# Altium PCB PAYL0009 GMSK Prototyping Board.PcbDoc
Units mm, origin at the board's own origin, x right, y up, seen from the top; angles counter-clockwise.
Board outline 100 x 50 mm, 2 copper layers (Top Layer, Bottom Layer); 75 components, 84 nets, 312 pads, 94 vias.
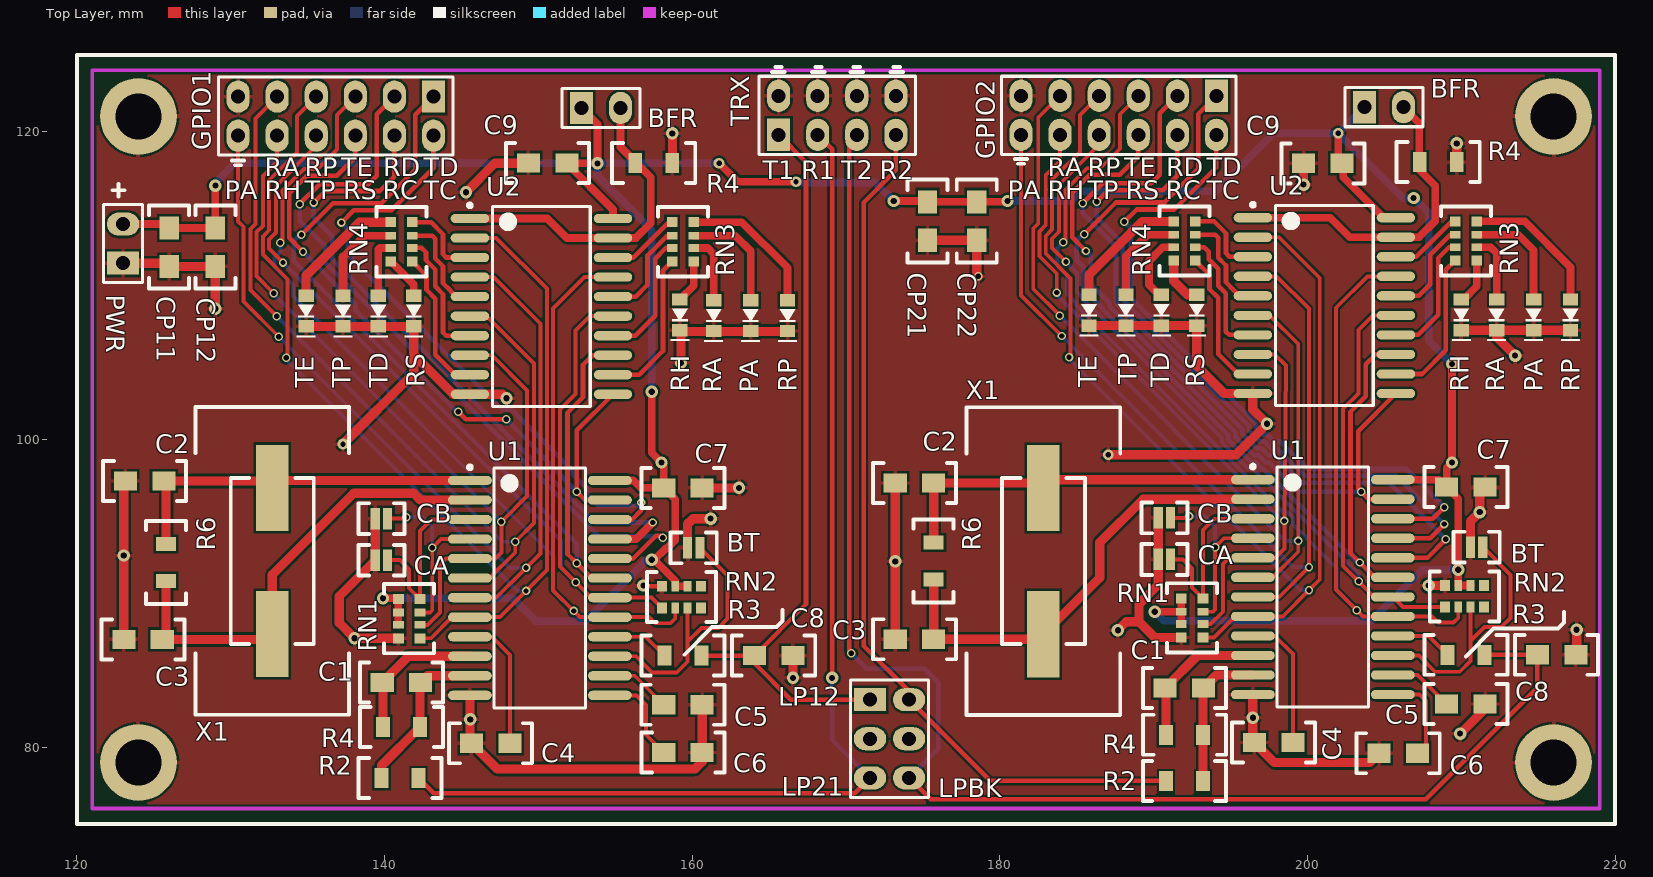
[diagram p0: Top Layer view]
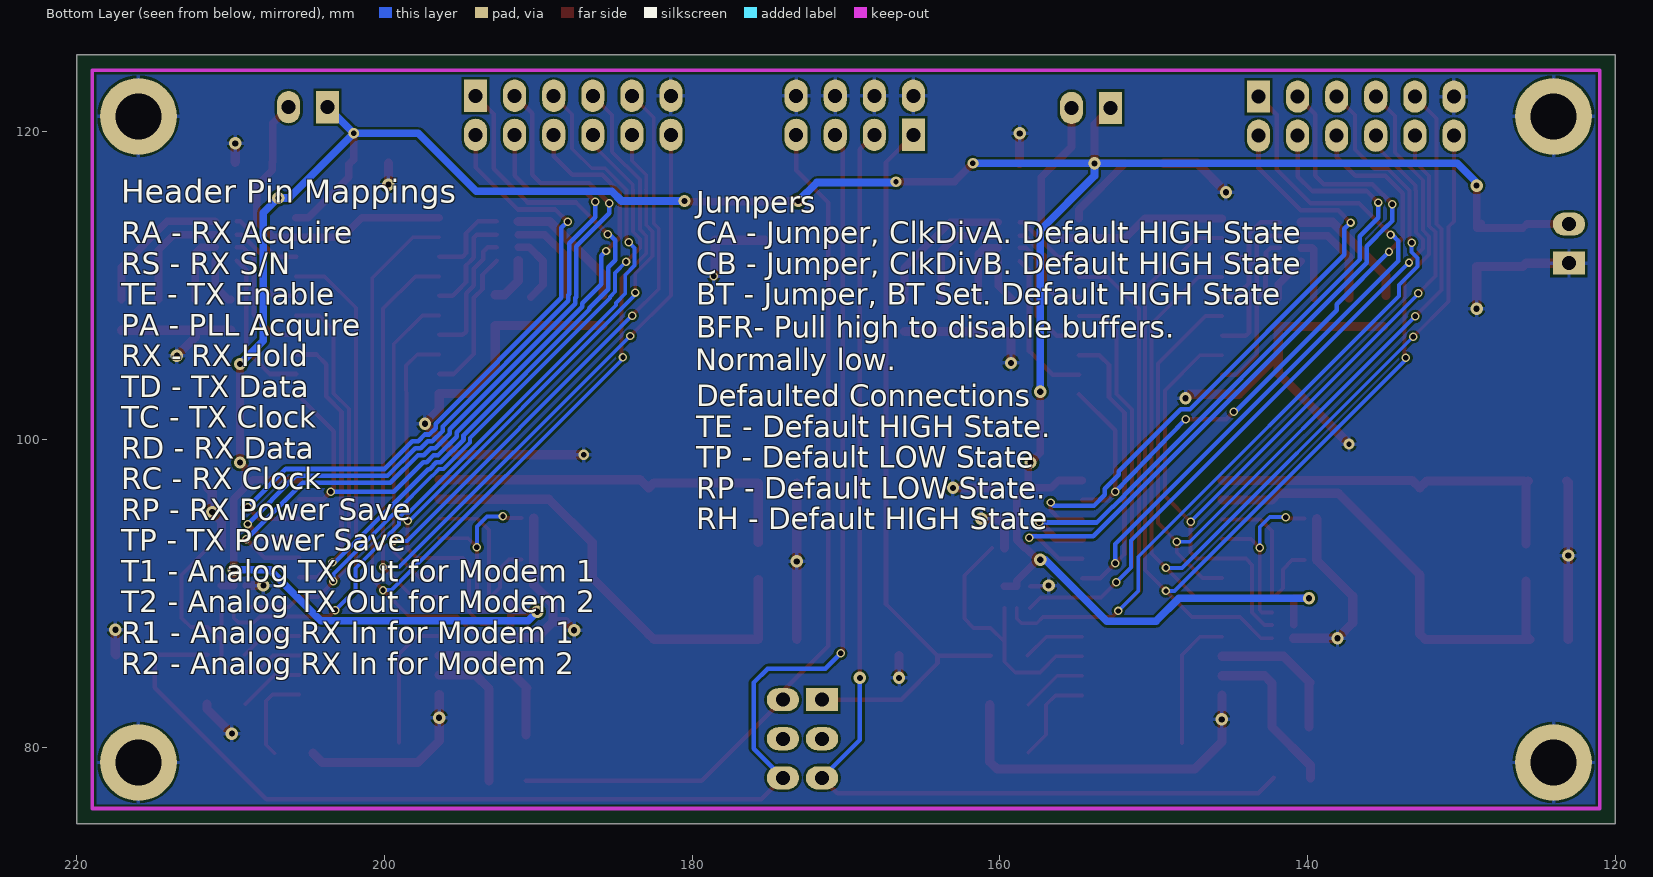
[diagram p1: Bottom Layer view, seen from below]

## Layer stack, top to bottom
Top Layer: signal copper 0.0356
Dielectric: dielectric 0.32, FR-4, Dk 4.8
Bottom Layer: signal copper 0.0356

## Board outline
120,125 220,125 220,75 120,75

## Design rules (kind name [scope] priority, off if disabled: settings)
Clearance [All] p1: gap=0.152
ComponentClearance [OnLayer('Top Layer') vs OnLayer('Top Layer')] p1: gap=0.1 collisioncheckmode=3 verticalgap=0 showdistances=FALSE
HoleSize [All] p1: absolutevalues=TRUE maxlimit=6.35 minlimit=0.3 maxpercent=80.000 minpercent=20.000
MinimumSolderMaskSliver [All] p1: minsoldermaskwidth=0.1
PasteMaskExpansion [All] p1: expansion=0.1
PolygonConnect [All] p1: connectstyle=Relief reliefconductorwidth=0.254 reliefentries=4 polygonreliefangle="90 Angle"
RoomDefinition "GMSK Prototyping Board" [InComponentClass('GMSK Prototyping Board')] p1: confinementstyle=ConfineIn formatcopy=TRUE lockcomponents=FALSE outline 219,76 219,124 121,124 121,76
RoutingVias [All] p1: holewidth=0.35 width=0.55 viastyle="Through Hole" minholewidth=0.35 minwidth=0.55 maxholewidth=0.65 maxwidth=1.3
SilkscreenOverComponentPads [All] p1: minsilkscreentomaskgap=0.254
SolderMaskExpansion [All] p1: expansion=0.1
Width [All] p1: maxlimit=0.6 minlimit=0.2 preferedwidth=0.25
23 further rules are at their usual default settings.

## Classes and differential pairs
channel class "GMSK Modem w Proto": S1 S2
component class S2: BFR C1 C2 C3 C4 C5 C6 C7 C8 CB PA R2 R3 R6 RA RH RN1 RN2 RN3 RN4 RP RS TD TE TP U1 U2 X1
component class "GMSK Prototyping Board": CP11 CP12 CP21 CP22 GPIO1 GPIO2 LPBK PWR TRX
component class S1: C1_S1 C2_S1 C3_S1 C4_S1 C5_S1 C6_S1 C7_S1 C8_S1 CBFR1_S1 D1_U1 D2_U1 D3_U1 D4_U1 D5_U1 D6_U1 D7_U1 D8_U1 J1_S1 J2_S1 J3_S1 J4_S1 R6_S1 R10_S1 R11_S1 RN1_S1 RN2_S1 RN3_S1 RN4_S1 U1_S1 U2_S1 X1_S1

## Components (designator, comment, footprint, x,y, rotation, side; value= is the part's Value field where it differs from the comment)
BFR "Header 2" HDR1X2 203.7,121.6 r0 top (schematic designator J4)
BFR "Header 2" HDR1X2 152.8,121.55 r0 top (schematic designator J4)
BT "Jumper" "Solder Jumper C" 211,93 r0 top (schematic designator J3)
BT "Jumper" "Solder Jumper C" 160.1,92.95 r0 top (schematic designator J3)
C1 "0805 Cap" "0805 Cap" 192,83.85 r180 top
C1 "0805 Cap" "0805 Cap" 141.1,84.2 r180 top
C2 "0805 Cap" "0805 Cap" 174.45,97.17 r0 top
C2 "0805 Cap" "0805 Cap" 124.4,97.3 r0 top
C3 "0805 Cap" "0805 Cap" 174.45,87.01 r0 top
C3 "0805 Cap" "0805 Cap" 124.3,87 r0 top
C4 "0805 Cap" "0805 Cap" 197.8,80.3 r0 top
C4 "0805 Cap" "0805 Cap" 146.9,80.25 r0 top
C5 "0805 Cap" "0805 Cap" 210.3,82.8 r180 top
C5 "0805 Cap" "0805 Cap" 159.4,82.75 r180 top
C6 "0805 Cap" "0805 Cap" 205.9,79.6 r180 top
C6 "0805 Cap" "0805 Cap" 159.4,79.65 r0 top
C7 "0805 Cap" "0805 Cap" 210.3,96.9 r180 top
C7 "0805 Cap" "0805 Cap" 159.4,96.85 r180 top
C8 "0805 Cap" "0805 Cap" 216.2,86 r180 top
C8 "0805 Cap" "0805 Cap" 165.3,85.95 r180 top
C9 "0805 Cap" "0805 Cap" 150.6,117.975 r180 top (schematic designator CBFR)
C9 "0805 Cap" "0805 Cap" 201,117.95 r180 top (schematic designator CBFR)
CA "Jumper" "Solder Jumper C" 190.7,92.2 r180 top (schematic designator J1)
CA "Jumper" "Solder Jumper C" 139.8,92.15 r180 top (schematic designator J1)
CB "Jumper" "Solder Jumper C" 190.7,94.9 r0 top (schematic designator J2)
CB "Jumper" "Solder Jumper C" 139.8,94.85 r0 top (schematic designator J2)
CP11 "0805 Cap" "0805 Cap" 126,112.5 r90 top
CP12 "0805 Cap" "0805 Cap" 129,112.5 r90 top
CP21 "0805 Cap" "0805 Cap" 175.3,114.2 r270 top
CP22 "0805 Cap" "0805 Cap" 178.5,114.2 r270 top
GPIO1 "Header 6X2" HDR2X6 143.18,122.29 r180 top (schematic designator P1)
GPIO2 "Header 6X2" HDR2X6 194.08,122.34 r180 top (schematic designator P2)
LPBK "Header 3X2" HDR2X3 171.56,83.08 r270 top (schematic designator J6)
PA "Green LED" "0805 LED" 214.7,108.1 r270 top (schematic designator PLA1)
PA "Green LED" "0805 LED" 163.8,108.05 r270 top (schematic designator PLA1)
PWR "Header 2" HDR1X2 123,111.46 r90 top
R2 "0805 Resistor" "0805 Resistor" 192,77.8 r180 top (schematic designator R4)
R2 "0805 Resistor" "0805 Resistor" 141,78 r0 top (schematic designator R4)
R3 "0805 Resistor" "0805 Resistor" 210.3,86 r180 top (schematic designator R10)
R3 "0805 Resistor" "0805 Resistor" 159.4,85.95 r180 top (schematic designator R10)
R4 "Comment" "0805 Resistor" 141.1,81.3 r0 top
R4 "Comment" "0805 Resistor" 192,80.8 r0 top
R4 "0805 Resistor" "0805 Resistor" 157.5,117.975 r0 top
R4 "0805 Resistor" "0805 Resistor" 208.5,118.025 r0 top
R6 "0805 Resistor" "0805 Resistor" 175.7,92.1 r90 top
R6 "0805 Resistor" "0805 Resistor" 125.8,92 r90 top
RA "Green LED" "0805 LED" 212.3,108.1 r270 top (schematic designator RXA1)
RA "Green LED" "0805 LED" 161.4,108.05 r270 top (schematic designator RXA1)
RH "Red LED" "0805 LED" 210,108.1 r270 top (schematic designator RXH1)
RH "Red LED" "0805 LED" 159.2,108.1 r270 top (schematic designator RXH1)
RN1 "RN4" ACAS_0612_AC 192.5,88.4 r270 top
RN1 "RN4" ACAS_0612_AC 141.6,88.35 r270 top
RN2 "RN4" ACAS_0612_AC 210.2,89.8 r0 top
RN2 "RN4" ACAS_0612_AC 159.3,89.75 r0 top
RN3 "RN4" ACAS_0612_AC 210.3,112.9 r90 top
RN3 "RN4" ACAS_0612_AC 159.4,112.85 r90 top
RN4 "RN4" ACAS_0612_AC 192,112.9 r270 top
RN4 "RN4" ACAS_0612_AC 141.1,112.85 r270 top
RP "Red LED" "0805 LED" 217.1,108.1 r270 top (schematic designator RPS1)
RP "Red LED" "0805 LED" 166.2,108.05 r270 top (schematic designator RPS1)
RS "Green LED" "0805 LED" 192.8,108.4 r270 top (schematic designator RSN1)
RS "Green LED" "0805 LED" 141.9,108.35 r270 top (schematic designator RSN1)
TD "Green LED" "0805 LED" 190.5,108.4 r270 top (schematic designator TXD1)
TD "Green LED" "0805 LED" 139.6,108.35 r270 top (schematic designator TXD1)
TE "Green LED" "0805 LED" 185.8,108.4 r270 top (schematic designator TXE1)
TE "Green LED" "0805 LED" 134.9,108.35 r270 top (schematic designator TXE1)
TP "Green LED" "0805 LED" 188.2,108.4 r270 top (schematic designator TPS1)
TP "Green LED" "0805 LED" 137.3,108.35 r270 top (schematic designator TPS1)
TRX "Header 4X2" HDR2X4 165.62,119.8 r0 top
U1 "CMX589A GMSK Modem" "SOIC24 - GMSK MODEM" 201,90.4 r0 top
U1 "CMX589A GMSK Modem" "SOIC24 - GMSK MODEM" 150.1,90.35 r0 top
U2 "74HC244 Octal Tri-State Buffer" SOIC20 201.1,108.7 r0 top
U2 "74HC244 Octal Tri-State Buffer" SOIC20 150.2,108.65 r0 top
X1 "HC49 Crystal" HC49 182.832,92.09 r270 top
X1 "HC49 Crystal" HC49 132.7,92.1 r270 top

## Footprints (in the part's own frame and the unit in brackets; to place one, negate y for a bottom-side part, rotate by r counter-clockwise, add the part's x,y. Pads: shape width x height; smd on the part's side, far side on the other; paste and mask are expansions set on the pad)
"0805 Cap" [mm]
  rect 1.5x1.25 smd: 1(1.25,0) 2(-1.25,0)
  silkscreen extent -2.7,-1.3 2.7,1.3, body extent -1.55,-0.63 1.55,0.63, height 1
"0805 LED" [mm] "0805 Light Emitting Diode"
  rect 0.8x1 smd: 1(-1,0) 2(1,0)
  silkscreen extent -0.4,-0.6 1.7,0.6
"0805 Resistor" [mm]
  rect 0.9x1.3 smd: 1(1.2,0) 2(-1.2,0)
  silkscreen extent -2.7,-1.3 2.7,1.3, body extent -1.4,-0.63 1.4,0.63, height 0.5
ACAS_0612_AC [mm]
  rect 0.65x0.7 smd: 1(-1.275,-0.7) 4(1.275,-0.7) 5(1.275,0.7) 8(-1.275,0.7)
  rect 0.5x0.7 smd: 2(-0.4,-0.7) 3(0.4,-0.7) 6(0.4,0.7) 7(-0.4,0.7)
  silkscreen extent -2.25,-1.63 2.25,1.63, body extent -1.6,-0.75 1.6,0.75, height 0.45
HC49 [mm] "Crystal Oscilator"
  rect 5.6x2.1 smd: 1(-4.75,0) 2(4.75,0)
  silkscreen extent -10,-5 10,5, body extent -5.4,-2.7 5.4,2.7, height 4.2
HDR1X2 [mm]
  rect 1.5x2.1 hole 0.91: 1(0,0)
  oval 1.5x2.1 hole 0.91: 2(2.54,0)
  silkscreen extent -1.27,-1.27 3.81,1.27, body extent -1.17,-1.17 3.71,1.17, height 7.01
HDR2X3 [mm]
  rect 1.5x2.1 hole 0.91: 1(0,0)
  oval 1.5x2.1 hole 0.91: 2(0,2.54) 3(2.54,0) 4(2.54,2.54) 5(5.08,0) 6(5.08,2.54)
  silkscreen extent -1.27,-1.27 6.35,3.81, body extent -1.17,-1.17 6.25,3.71, height 7.01
HDR2X4 [mm]
  rect 1.5x2.1 hole 0.91: 1(0,0)
  oval 1.5x2.1 hole 0.91: 2(0,2.54) 3(2.54,0) 4(2.54,2.54) 5(5.08,0) 6(5.08,2.54) 7(7.62,0) 8(7.62,2.54)
  silkscreen extent -1.27,-1.27 8.89,3.81, body extent -1.17,-1.17 8.79,3.71, height 7.01
HDR2X6 [mm]
  rect 1.5x2.1 hole 0.91: 1(0,0)
  oval 1.5x2.1 hole 0.91: 2(0,2.54) 3(2.54,0) 4(2.54,2.54) 5(5.08,0) 6(5.08,2.54) 7(7.62,0) 8(7.62,2.54) 9(10.16,0) 10(10.16,2.54) 11(12.7,0) 12(12.7,2.54)
  silkscreen extent -1.27,-1.27 13.97,3.81, body extent -1.18,-1.18 13.87,3.72, height 7.01
SOIC20 [mm]
  oval 2.5x0.6 smd: 1(-4.65,5.715) 2(-4.65,4.445) 3(-4.65,3.175) 4(-4.65,1.905) 5(-4.65,0.635) 6(-4.65,-0.635) 7(-4.65,-1.905) 8(-4.65,-3.175) 9(-4.65,-4.445) 10(-4.65,-5.715) 11(4.65,-5.715) 12(4.65,-4.445) 13(4.65,-3.175) 14(4.65,-1.905) 15(4.65,-0.635) 16(4.65,0.635) 17(4.65,1.905) 18(4.65,3.175) 19(4.65,4.445) 20(4.65,5.715)
  silkscreen extent -4.77,-6.5 3.17,6.69, body extent -5.36,-6.5 5.33,6.5, height 2.65
"SOIC24 - GMSK MODEM" [mm]
  oval 2.85x0.6 smd: 1(-4.55,6.985) 2(-4.55,5.715) 3(-4.55,4.445) 4(-4.55,3.175) 5(-4.55,1.905) 6(-4.55,0.635) 7(-4.55,-0.635) 8(-4.55,-1.905) 9(-4.55,-3.175) 10(-4.55,-4.445) 11(-4.55,-5.715) 12(-4.55,-6.985) 13(4.55,-6.985) 14(4.55,-5.715) 15(4.55,-4.445) 16(4.55,-3.175) 17(4.55,-1.905) 18(4.55,-0.635) 19(4.55,0.635) 20(4.55,1.905) 21(4.55,3.175) 22(4.55,4.445) 23(4.55,5.715) 24(4.55,6.985)
  silkscreen extent -4.67,-7.8 2.97,7.96, body extent -5.38,-7.79 5.38,7.79, height 2.67
"Solder Jumper C" [mm] "Solder Jumper C"
  rect 0.6x1.4 smd: 1(0.4,0) 2(-0.4,0)
  silkscreen extent -1.5,-1 1.5,1

## Part data
BFR BFR PWR: "Header, 2-Pin"
BT BT CA CA CB CB: library part "Solder Bridge", "Solder Bridge"
C1 C1 C2 C2 C3 C3 C8 C8: library part "0805 MLCC - NP0, 5%", "0805 MLCC - NP0, 5%"
C4 C4 C5 C5 C6 C6 C7 C7 C9 C9 CP11 CP12 CP21 CP22: library part "0805 MLCC - X7R, 10%", "0805 MLCC - X7R, 10%"
GPIO1 GPIO2: "Header, 6-Pin, Dual row"
LPBK: "Header, 3-Pin, Dual row"
PA PA RA RA RS RS TD TD TE TE TP TP: library part "LED, SMD, GREEN", "Chip LED, Green, 0603 Footprint"
R2 R2 R3 R3 R4 R4 R6 R6: library part "0805 Thin Film Resistor 0.1%", "0805 Thin Film Resistor 0.1%"
R4 R4: library part "0805 Thin Film Resistor 0.1%"
RH RH RP RP: library part "LED, SMD, RED", "Chip LED, Red, 0603 Footprint"
TRX: "Header, 4-Pin, Dual row"
U1 U1: library part CMX589A
U2 U2: library part 74HC244, "Octal Non-Inverting Three state buffer"

## Free pads (board coordinates)
  round 5 hole 3: SCR1(124,121) SCR2(216,121) SCR3(124,79) SCR4(216,79)

## Via types
v1: diameter 0.55, hole 0.35, Top Layer to Bottom Layer, tented both sides, 52 vias
v2: diameter 0.8, hole 0.4, Top Layer to Bottom Layer, tented both sides, 36 vias
v3: diameter 0.7, hole 0.35, Top Layer to Bottom Layer, 5 vias
v4: diameter 0.8, hole 0.4, Top Layer to Bottom Layer, 1 vias

## Nets (pads, with @x,y where several pads share a name; then routed paths per layer and width w, separated by ;. In a path a pad name is that pad's centre, name@x,y a point inside that pad or via, vN(x,y) a via of type N, cw(c..) or ccw(c..) an arc to the next point about the centre after c; other vN are vias at no path point)
BT_S1: BT.1@160.5,92.95 RN2.3@159.7,89.05 U1.15@154.65,85.905 | length 17.8
  Top Layer w0.254: U1.15@154.65,85.905 156.345,85.905 157.4,84.85 159,84.85 159.7,85.55 159.7,86.85 ; RN2.3@159.7,89.05 159.7,86.85 ; BT.1@160.5,92.95 162.3,91.15 162.3,88.35 161.7,87.75 160.6,87.75 159.7,86.85
BT_S2: BT.1@211.4,93 RN2.3@210.6,89.1 U1.15@205.55,85.955 | length 17.8
  Top Layer w0.254: U1.15@205.55,85.955 207.245,85.955 208.3,84.9 209.9,84.9 210.6,85.6 210.6,86.9 ; RN2.3@210.6,89.1 210.6,86.9 ; BT.1@211.4,93 213.2,91.2 213.2,88.4 212.6,87.8 211.5,87.8 210.6,86.9
CDIVA_S1: CA.2@140.2,92.15 RN1.8@142.3,89.625 U1.3@145.55,94.795 | length 11.8
  Top Layer w0.254: CA.2@140.2,92.15 141,92.15 141.6,91.55 141.6,90.325 142.3,89.625 142.3,94.05 143.045,94.795 U1.3@145.55,94.795
CDIVA_S2: CA.2@191.1,92.2 RN1.8@193.2,89.675 U1.3@196.45,94.845 | length 11.8
  Top Layer w0.254: CA.2@191.1,92.2 191.9,92.2 192.5,91.6 192.5,90.375 193.2,89.675 193.2,94.1 193.945,94.845 U1.3@196.45,94.845
CDIVB_S1: CB.1@140.2,94.85 RN1.7@142.3,88.75 U1.4@145.55,93.525 | length 12.2
  Top Layer w0.254: CB.1@140.2,94.85 141.3,94.85 v1(141.4,94.95) ; RN1.7@142.3,88.75 142.953,88.75 143.1,88.897 v1(143.1,92.95) 143.675,93.525 U1.4@145.55,93.525
  Bottom Layer w0.254: v1(141.4,94.95) 142.45,94.95 143.1,94.3 v1(143.1,92.95)
CDIVB_S2: CB.1@191.1,94.9 RN1.7@193.2,88.8 U1.4@196.45,93.575 | length 12.2
  Top Layer w0.254: CB.1@191.1,94.9 192.2,94.9 v1(192.3,95) ; RN1.7@193.2,88.8 193.853,88.8 194,88.947 v1(194,93) 194.575,93.575 U1.4@196.45,93.575
  Bottom Layer w0.254: v1(192.3,95) 193.35,95 194,94.35 v1(194,93)
GND: BT.2 C2.2 C3.2 C4.2 C5.2 C6.1 C7.2 C8.2 C9.1 CA.1 CB.2 CP11.2 CP12.2 CP21.1 CP22.1 GPIO1.11 GPIO2.11 PA.2 pad.SCR1 pad.SCR2 pad.SCR3 pad.SCR4 PWR.1 R4.1@158.7,117.975 R4.1@209.7,118.025 RA.2 RH.2 RN1.4 RN2.8 RP.2 RS.2 TD.2 TE.2 TP.2 TRX.2 TRX.4 TRX.6 TRX.8 U1.12 U2.10 | length 190.8
  Top Layer w0.3: v2(156.825,90.5) 156.875,90.45 RN2.8@158.025,90.45
  Top Layer w0.6: PWR.1@122.7,111.1 PWR.1@122.95,111.35 ; PWR.1 125.79,111.46 CP11.2 CP12.2 v2(129,108.5) ; C3.2@123.05,87 v2(123.05,92.45) 123.05,97.2 C2.2@123.15,97.3 ; TE.2@135.05,107.35 141.9,107.35 141.9,105.5 ; v3(137.3,99.7) 141.9,104.3 141.9,105.5 ; CB.2@139.4,94.85 139.4,92.15 137.05,89.8 137.05,88.075 v2(138.05,87.075) RN1.4@140.9,87.075 ; v2(145.3,116.075) 147.175,117.95 C9.1@149.35,117.95 ; U1.12@145.55,83.365 145.55,80.35 145.65,80.25 147.327,78.573 160.175,78.573 160.65,79.047 160.65,79.65 C5.2@160.65,82.75 ; v2(147.925,102.675) 147.665,102.935 145.55,102.935 144.465,102.935 141.9,105.5 ; R4.1@158.713,117.962 v2@158.713,119.9 ; v2(159.275,104.975) 159.275,107.025 RP.2@166.175,107.025 ; BT.2@159.7,92.95 159.7,94.5 160.05,94.85 v2(161.2,94.85) ; C7.2@160.65,96.85 v2(163.05,96.85) ; v2(166.55,84.5) C8.2@166.55,85.95 ; C3.2@173.2,87.01 C2.2@173.2,97.17 ; CP21.1 CP22.1 178.5,110.7 v1(178.6,110.6) ; TE.2@185.8,107.4 188.2,107.4 190.5,107.4 192.8,107.4 192.8,104.785 194.6,102.985 196.45,102.985 196.45,101.95 v2(197.375,101.025) 195.35,99 v3(187.05,99) ; v2(187.675,87.6) 188.225,88.15 189.05,88.15 ; CB.2@190.3,94.9 190.3,92.2 190.3,90.55 189.05,89.3 189.05,88.15 ; RN1.4@191.8,87.125 190.075,87.125 189.05,88.15 ; U1.12@196.45,83.415 v2(196.45,81.907) 196.45,80.4 196.55,80.3 197.85,79 204.05,79 C6.1@204.65,79.6 ; v2(199.75,116.564) C9.1@199.75,117.95 ; v2(207.875,90.5) RN2.8@208.925,90.5 ; R4.1@209.7,118.025 v2(209.7,119.25) ; v2(209.925,80.875) 211.55,82.5 C5.2@211.55,82.8 ; RH.2@210,107.1 RA.2@212.3,107.1 ; BT.2@210.6,93 210.6,94.675 v2(211.2,95.275) 211.2,96.55 C7.2@211.55,96.9 ; RA.2@212.3,107.25 RA.2@212.3,107.1 ; v2(213.5,105.45) 212.3,106.65 RA.2@212.3,107.1 ; RP.2@217.1,107.1 214.7,107.1 RA.2@212.3,107.1 ; C8.2@217.45,86 217.5,86.05 v2(217.5,87.625)
  other v2: 145.575,81.8 173.2,92.075 158.7,119.9
NetC1_S1_1: C1.1@139.85,84.2 R4.2@139.9,81.3 U1.10@145.55,85.905 | length 9.3
  Top Layer w0.6: R4.2@139.9,81.3 139.9,84.15 139.85,84.2 141.555,85.905 U1.10@145.55,85.905
NetC1_S1_2: C1.2@142.35,84.2 R2.2@139.8,78 R4.1@142.3,81.3 U1.11@145.55,84.635 | length 10.6
  Top Layer w0.6: R2.2@139.8,78 139.8,78.8 142.3,81.3 142.3,84.15 142.35,84.2 142.785,84.635 U1.11@145.55,84.635
NetC1_S2_1: C1.1@190.75,83.85 R4.2@190.8,80.8 U1.10@196.45,85.955 | length 9.6
  Top Layer w0.6: R4.2@190.8,80.8 190.8,83.8 190.75,83.85 192.855,85.955 U1.10@196.45,85.955
NetC1_S2_2: C1.2@193.25,83.85 R2.2@193.2,77.8 R4.1@193.2,80.8 U1.11@196.45,84.685 | length 9.6
  Top Layer w0.6: R2.2@193.2,77.8 193.2,80.8 193.2,83.8 193.25,83.85 194.085,84.685 U1.11@196.45,84.685
NetC2_S1_1: C2.1@125.65,97.3 R6.1@125.8,93.2 U1.1@145.55,97.335 X1.1@132.7,96.85 | length 24.4
  Top Layer w0.6: C2.1@125.65,97.3 C2.1@125.8,97.15 ; R6.1@125.8,93.2 C2.1@125.8,97.15 ; U1.1@145.55,97.335 133.185,97.335 132.7,96.85 132.25,97.3 125.95,97.3 C2.1@125.8,97.15
NetC2_S2_1: C2.1@175.7,97.17 R6.1@175.7,93.3 U1.1@196.45,97.385 X1.1@182.832,96.84 | length 25
  Top Layer w0.6: R6.1@175.7,93.3 175.7,97.17 182.502,97.17 182.832,96.84 183.377,97.385 U1.1@196.45,97.385
NetC3_S1_1: C3.1@125.55,87 R6.2@125.8,90.8 U1.2@145.55,96.065 X1.2@132.7,87.35 | length 30.3
  Top Layer w0.6: R6.2@125.8,90.8 125.8,87.25 125.55,87 132.35,87 132.7,87.35 132.7,91.2 138,96.5 141.9,96.5 142.335,96.065 U1.2@145.55,96.065
NetC3_S2_1: C3.1@175.7,87.01 R6.2@175.7,90.9 U1.2@196.45,96.115 X1.2@182.832,87.34 | length 29.8
  Top Layer w0.6: R6.2@175.7,90.9 175.7,87.01 182.502,87.01 182.832,87.34 186.5,91.008 186.5,93.3 189.315,96.115 U1.2@196.45,96.115
NetC4_S1_1: C4.1@148.15,80.25 U1.9@145.55,87.175 | length 8.8
  Top Layer w0.254: U1.9@145.55,87.175 146.975,87.175 148.15,86 C4.1@148.15,80.25
NetC4_S2_1: C4.1@199.05,80.3 U1.9@196.45,87.225 | length 8.8
  Top Layer w0.254: U1.9@196.45,87.225 197.875,87.225 199.05,86.05 C4.1@199.05,80.3
NetC5_S1_1: C5.1@158.15,82.75 U1.14@154.65,84.635 | length 4.3
  Top Layer w0.254: U1.14@154.65,84.635 156.265,84.635 C5.1@158.15,82.75
NetC5_S2_1: C5.1@209.05,82.8 U1.14@205.55,84.685 | length 4.3
  Top Layer w0.254: U1.14@205.55,84.685 207.165,84.685 C5.1@209.05,82.8
NetC6_S1_2: C6.2@158.15,79.65 U1.13@154.65,83.365 | length 6.2
  Top Layer w0.254: U1.13@154.65,83.365 156.385,83.365 157,82.75 157,80.8 C6.2@158.15,79.65
NetC6_S2_2: C6.2@207.15,79.6 U1.13@205.55,83.415 | length 5.9
  Top Layer w0.254: U1.13@205.55,83.415 207.285,83.415 207.7,83 207.7,80.15 C6.2@207.15,79.6
NetD1_U1_1: RH.1@159.2,109.1 RN3.1@160.1,111.575 | length 2.8
  Top Layer w0.5: RH.1@159.2,109.1 160.1,110 RN3.1@160.1,111.575
NetD1_U2_1: RH.1@210,109.1 RN3.1@211,111.625 | length 3
  Top Layer w0.5: RH.1@210,109.1 210.15,109.1 211,109.95 RN3.1@211,111.625
NetD2_U1_1: RA.1@161.4,109.05 RN3.2@160.1,112.45 | length 4.5
  Top Layer w0.5: RN3.2@160.1,112.45 161,112.45 161.4,112.05 RA.1@161.4,109.05
NetD2_U2_1: RA.1@212.3,109.1 RN3.2@211,112.5 | length 4.5
  Top Layer w0.5: RN3.2@211,112.5 211.9,112.5 212.3,112.1 RA.1@212.3,109.1
NetD3_U1_1: PA.1@163.8,109.05 RN3.3@160.1,113.25 | length 7.3
  Top Layer w0.5: RN3.3@160.1,113.25 162.8,113.25 163.8,112.25 PA.1@163.8,109.05
NetD3_U2_1: PA.1@214.7,109.1 RN3.3@211,113.3 | length 7.3
  Top Layer w0.5: RN3.3@211,113.3 213.7,113.3 214.7,112.3 PA.1@214.7,109.1
NetD4_U1_1: RN3.4@160.1,114.125 RP.1@166.2,109.05 | length 9.4
  Top Layer w0.5: RN3.4@160.1,114.125 163.225,114.125 166.2,111.15 RP.1@166.2,109.05
NetD4_U2_1: RN3.4@211,114.175 RP.1@217.1,109.1 | length 9.4
  Top Layer w0.5: RN3.4@211,114.175 214.125,114.175 217.1,111.2 RP.1@217.1,109.1
NetD5_U1_1: RN4.4@140.4,111.575 RS.1@141.9,109.35 | length 3
  Top Layer w0.5: RN4.4@140.4,111.575 141.9,110.075 RS.1@141.9,109.2
NetD5_U2_1: RN4.4@191.3,111.625 RS.1@192.8,109.4 | length 3.2
  Top Layer w0.6: RN4.4@191.3,111.625 191.3,110.3 192.2,109.4 RS.1@192.8,109.4
NetD6_U1_1: RN4.3@140.4,112.45 TD.1@139.6,109.35 | length 4
  Top Layer w0.5: TD.1@139.6,109.2 139.6,112.35 139.7,112.45 RN4.3@140.4,112.45
NetD6_U2_1: RN4.3@191.3,112.5 TD.1@190.5,109.4 | length 4.7
  Top Layer w0.5: TD.1@190.5,109.25 189.7,110.05 189.7,111.6 190.6,112.5 RN4.3@191.3,112.5
NetD7_U1_1: RN4.2@140.4,113.25 TP.1@137.3,109.35 | length 6.3
  Top Layer w0.5: 137.3,111.85 138.7,113.25 RN4.2@140.4,113.25
  Top Layer w0.6: TP.1@137.3,109.2 137.3,111.85
NetD7_U2_1: RN4.2@191.3,113.3 TP.1@188.2,109.4 | length 6.2
  Top Layer w0.5: TP.1@188.2,109.4 188.2,111.9 189.6,113.3 RN4.2@191.3,113.3
NetD8_U1_1: RN4.1@140.4,114.125 TE.1@134.9,109.35 | length 8.2
  Top Layer w0.6: TE.1@134.9,109.35 134.9,110.65 138.375,114.125 RN4.1@140.4,114.125
NetD8_U2_1: RN4.1@191.3,114.175 TE.1@185.8,109.4 | length 8.2
  Top Layer w0.6: TE.1@185.8,109.4 185.8,110.7 189.275,114.175 RN4.1@191.3,114.175
NetJ4_S1_2: BFR.2@155.34,121.55 R4.2@156.3,117.975 U2.1@145.55,114.365 U2.19@154.85,113.095 | length 21
  Top Layer w0.5: U2.1@145.55,114.365 150.585,114.365 151.855,113.095 154.85,113.095 156.345,113.095 157.3,114.05 157.3,117.05 155.34,119.01 BFR.2@155.34,121.55
NetJ4_S2_2: BFR.2@206.24,121.6 R4.2@207.3,118.025 U2.1@196.45,114.415 U2.19@205.75,113.145 | length 21.1
  Top Layer w0.5: U2.1@196.45,114.415 201.485,114.415 202.755,113.145 205.75,113.145 207.245,113.145 208.3,114.2 208.3,116.5 207.3,117.5 207.3,118.025 207.275,118.05 207.275,120.565 BFR.2@206.24,121.6
NetR3_S1_1: R3.1@158.2,85.95 U1.16@154.65,87.175 | length 4.1
  Top Layer w0.254: U1.16@154.65,87.175 156.975,87.175 R3.1@158.2,85.95
NetR3_S2_1: R3.1@209.1,86 U1.16@205.55,87.225 | length 4.1
  Top Layer w0.254: U1.16@205.55,87.225 207.875,87.225 R3.1@209.1,86
PLA_S1: RN3.6@158.7,113.25 U2.16@154.85,109.285 | length 6.6
  Top Layer w0.3: U2.16@154.85,109.285 156.335,109.285 157.094,110.044 157.094,111.955 158.388,113.25 RN3.6@158.7,113.25
PLA_S2: RN3.6@209.6,113.3 U2.16@205.75,109.335 | length 6.6
  Top Layer w0.3: U2.16@205.75,109.335 207.235,109.335 207.994,110.094 207.994,112.005 209.288,113.3 RN3.6@209.6,113.3
PLLACQ1: GPIO1.12 U1.7@145.55,89.715 U2.4@145.55,110.555 | length 63
  Top Layer w0.254: GPIO1.12 130.48,114.17 130.825,113.825 130.825,108.975 v1(133.125,106.675) ; U1.7@145.55,89.715 147.265,89.715 v1(149.2,91.65) 150.131,92.581 150.131,107.519 147.095,110.555 U2.4@145.55,110.555
  Bottom Layer w0.254: v1(133.125,106.675) 148.15,91.65 v1(149.2,91.65)
PLLACQ2: GPIO2.12 U1.7@196.45,89.765 U2.4@196.45,110.605 | length 62.2
  Top Layer w0.254: GPIO2.12 181.38,109.37 v1(184.025,106.725) ; U1.7@196.45,89.765 198.165,89.765 v1(200.1,91.7) 200.1,108.5 197.995,110.605 U2.4@196.45,110.605
  Bottom Layer w0.254: v1(184.025,106.725) 199.05,91.7 v1(200.1,91.7)
RPS_S1: RN3.5@158.7,114.125 U2.18@154.85,111.825 | length 4.8
  Top Layer w0.3: U2.18@154.85,111.825 156.175,111.825 158.475,114.125 RN3.5@158.7,114.125
RPS_S2: RN3.5@209.6,114.175 U2.18@205.75,111.875 | length 4.8
  Top Layer w0.3: U2.18@205.75,111.875 207.075,111.875 209.375,114.175 RN3.5@209.6,114.175
RSN_S1: RN4.5@141.8,111.575 U2.9@145.55,104.205 | length 9.5
  Top Layer w0.3: RN4.5@141.8,111.575 142.728,110.647 142.728,109.722 143.297,109.153 143.297,105.503 144.595,104.205 U2.9@145.55,104.205
RSN_S2: RN4.5@192.7,111.625 U2.9@196.45,104.255 | length 9.5
  Top Layer w0.3: RN4.5@192.7,111.625 193.628,110.697 193.628,109.772 194.197,109.203 194.197,105.553 195.495,104.255 U2.9@196.45,104.255
RX1: LPBK.5 R2.1@142.2,78 TRX.3 | length 73.4
  Top Layer w0.3: R2.1@142.2,78 143.2,77 170.56,77 LPBK.5 ; TRX.3 169.1,118.86 v4(169.1,84.5)
  Bottom Layer w0.3: v4(169.1,84.5) 169.1,80.46 LPBK.5
RX2: LPBK.2 R2.1@190.8,77.8 TRX.7 | length 57.7
  Top Layer w0.3: TRX.7 173.24,117.49 171.152,115.402 171.152,86.573 174.1,83.625 LPBK.2 179.38,77.8 R2.1@190.8,77.8
RX_PSAVE1: GPIO1.7 RN1.5@142.3,87.075 U1.8@145.55,88.445 U2.2@145.55,113.095 | length 76
  Top Layer w0.254: v1(133.6,105.3) 133.7,105.4 133.7,110.416 132.088,112.028 132.088,113.188 132.5,113.6 132.5,116.85 134.3,118.65 134.3,121.03 GPIO1.7 ; RN1.5@142.3,87.075 143.025,87.075 144.395,88.445 145.55,88.445 147.495,88.445 v1(149.2,90.15) 150.55,91.5 150.55,109.8 147.255,113.095 U2.2@145.55,113.095
  Bottom Layer w0.254: v1(133.6,105.3) 133.7,105.4 133.7,105.1 148.65,90.15 v1(149.2,90.15)
RX_PSAVE2: GPIO2.7 RN1.5@193.2,87.125 U1.8@196.45,88.495 U2.2@196.45,113.145 | length 75.5
  Top Layer w0.254: v1(184.5,105.35) 184.6,105.45 184.6,110.466 182.988,112.078 182.988,113.238 183.4,113.65 183.4,116.9 185.2,118.7 185.2,121.08 GPIO2.7 ; RN1.5@193.2,87.125 193.925,87.125 195.295,88.495 196.45,88.495 198.395,88.495 v1(200.1,90.2) 200.8,90.9 200.8,110.5 198.155,113.145 U2.2@196.45,113.145
  Bottom Layer w0.254: v1(184.5,105.35) 184.6,105.45 184.6,105.15 199.55,90.2 v1(200.1,90.2)
RX_S/N1: GPIO1.6 U1.23@154.65,96.065 U2.11@154.85,102.935 | length 45.1
  Top Layer w0.3: v1(134.7,112.2) 133.8,113.1 133.8,116 134.95,117.15 136.9,117.15 138.1,118.35 GPIO1.6 ; v1(144.8,101.8) 145.275,101.325 v1(147.925,101.325) ; U1.23@154.65,96.065 153.035,96.065 v1(152.5,96.6) 152.5,100.585 U2.11@154.85,102.935
  Bottom Layer w0.3: v1(134.7,112.2) 138.1,108.8 138.1,108.4 144.7,101.8 v1(144.8,101.8) ; v1(147.925,101.325) v1(152.5,96.6)
RX_S/N2: GPIO2.6 U1.23@205.55,96.115 U2.11@205.75,102.985 | length 46.3
  Top Layer w0.3: v1(185.6,112.25) 184.7,113.15 184.7,116.05 185.85,117.2 187.8,117.2 189,118.4 GPIO2.6 ; U1.23@205.55,96.115 203.985,96.115 v1(203.5,96.6) 203.3,96.8 203.3,100.535 U2.11@205.75,102.985
  Bottom Layer w0.3: v1(185.6,112.25) 185.9,111.95 185.9,110.1 187.143,108.857 187.143,108.638 195.315,100.465 195.315,100.172 196.522,98.965 196.815,98.965 197.258,98.522 197.478,98.522 199.4,96.6 v1(203.5,96.6)
RXA_S1: RN3.7@158.7,112.45 U2.14@154.85,106.745 | length 8.4
  Top Layer w0.3: U2.14@154.85,106.745 156.295,106.745 157.597,108.047 157.597,111.747 158.3,112.45 RN3.7@158.7,112.45
RXA_S2: RN3.7@209.6,112.5 U2.14@205.75,106.795 | length 8.4
  Top Layer w0.3: U2.14@205.75,106.795 207.195,106.795 208.497,108.097 208.497,111.797 209.2,112.5 RN3.7@209.6,112.5
RXACQ1: GPIO1.9 U1.6@145.55,90.985 U2.6@145.55,108.015 | length 59.2
  Top Layer w0.254: v1(133,108) 131.275,109.725 131.275,113.675 131.6,114 131.6,120.87 GPIO1.9 ; U1.6@145.55,90.985 146.835,90.985 148.5,92.65 v1(148.5,93.35) 149.725,94.575 149.725,104.925 146.635,108.015 U2.6@145.55,108.015
  Bottom Layer w0.254: v1(133,108) 147.65,93.35 v1(148.5,93.35)
RXACQ2: GPIO2.9 U1.6@196.45,91.035 U2.6@196.45,108.065 | length 58.2
  Top Layer w0.254: v1(183.9,108.05) 182.175,109.775 182.175,113.725 182.5,114.05 182.5,120.92 GPIO2.9 ; U1.6@196.45,91.035 197.735,91.035 199.4,92.7 v1(199.4,93.4) 199.4,106.2 197.535,108.065 U2.6@196.45,108.065
  Bottom Layer w0.254: v1(183.9,108.05) 198.55,93.4 v1(199.4,93.4)
RXCLK1: GPIO1.4 U1.21@154.65,93.525 | length 43.9
  Top Layer w0.3: v1(135.4,115.4) 136.15,116.15 139.7,116.15 140.64,117.09 GPIO1.4
  Top Layer w0.5: U1.21@154.65,93.525 156.35,93.525 v1(157.425,94.6)
  Bottom Layer w0.3: v1(135.4,115.4) 135.4,114.4 136.6,113.2 136.6,111.7 151.923,96.377 151.923,96.342 152.642,95.623 152.677,95.623 153.7,94.6 v1(157.425,94.6)
RXCLK2: GPIO2.4 U1.21@205.55,93.575 | length 46.5
  Top Layer w0.3: v1(186.3,115.45) 187.05,116.2 190.6,116.2 191.54,117.14 GPIO2.4 ; U1.21@205.55,93.575 207.975,93.575 v1(208.9,94.5)
  Bottom Layer w0.3: v1(186.3,115.45) 186.3,114.45 187.996,112.754 187.996,109.444 188.048,109.392 188.048,109.013 196.22,100.84 196.22,100.547 196.897,99.87 197.19,99.87 197.633,99.427 198.013,99.427 199.81,97.63 205.77,97.63 v1(208.9,94.5)
RXDATA1: GPIO1.3 U1.20@154.65,92.255 | length 49.4
  Top Layer w0.3: v1(134.5,115.3) 134.5,115.317 135.786,116.602 138.952,116.602 139.5,117.15 139.5,121.15 GPIO1.3 ; U1.20@154.65,92.255 156.155,92.255 157.65,93.75 157.937,93.75 v1(158.083,93.605)
  Bottom Layer w0.3: v1(134.5,115.3) 134.5,114.2 134.823,113.877 134.839,113.877 136.148,112.569 136.148,111.477 153.93,93.695 157.923,93.695 158.048,93.57 v1(158.083,93.605)
RXDATA2: GPIO2.3 U1.20@205.55,92.305 | length 50.7
  Top Layer w0.3: v1(185.4,115.35) 185.4,115.367 186.686,116.652 189.852,116.652 190.4,117.2 190.4,121.2 GPIO2.3 ; U1.20@205.55,92.305 207.805,92.305 v1(209,93.5)
  Bottom Layer w0.3: v1(185.4,115.35) 185.4,114.694 187.544,112.55 187.544,109.256 187.595,109.205 187.595,108.825 195.768,100.653 195.768,100.359 196.709,99.418 197.003,99.418 197.446,98.975 197.825,98.975 199.623,97.177 205.323,97.177 v1(209,93.5)
RXH_S1: RN3.8@158.7,111.575 U2.12@154.85,104.205 | length 10
  Top Layer w0.3: U2.12@154.85,104.205 156.555,104.205 158.1,105.75 158.1,110.975 RN3.8@158.7,111.575
RXH_S2: RN3.8@209.6,111.625 U2.12@205.75,104.255 | length 10
  Top Layer w0.3: U2.12@205.75,104.255 207.455,104.255 209,105.8 209,111.025 RN3.8@209.6,111.625
RXHOLD1: GPIO1.10 RN1.6@142.3,87.95 U1.5@145.55,92.255 U2.8@145.55,105.475 | length 57.1
  Top Layer w0.254: 132.094,116.2 132.087,116.193 ; v1(132.8,109.5) 131.681,110.619 131.681,113.475 132.087,113.88 132.087,116.193 ; GPIO1.10 133.02,118.07 132.087,117.137 132.087,116.193 ; RN1.6@142.3,87.95 142.8,87.95 143.6,88.75 143.6,91.85 144.005,92.255 145.55,92.255 147.205,92.255 147.6,92.65 v1(147.6,94.65) 149.275,96.325 149.275,103.175 146.975,105.475 U2.8@145.55,105.475
  Bottom Layer w0.254: v1@132.813,109.437 v1(147.6,94.65)
RXHOLD2: GPIO2.10 RN1.6@193.2,88 U1.5@196.45,92.305 U2.8@196.45,105.525 | length 55.7
  Top Layer w0.254: 182.994,116.25 182.987,116.243 ; v1(183.7,109.55) 183.7,110.791 182.581,111.91 182.581,113.525 182.987,113.93 182.987,116.243 ; GPIO2.10 183.92,118.12 182.987,117.187 182.987,116.243 ; RN1.6@193.2,88 193.7,88 194.5,88.8 194.5,91.9 194.905,92.305 196.45,92.305 197.9,92.305 198.5,92.905 v1(198.5,94.7) 198.6,104.8 197.875,105.525 U2.8@196.45,105.525
  Bottom Layer w0.254: v1@183.713,109.487 183.713,109.378 198.391,94.7 v1(198.5,94.7)
TPS_S1: RN4.7@141.8,113.25 U2.5@145.55,109.285 | length 6.8
  Top Layer w0.3: RN4.7@141.8,113.25 143.1,113.25 143.3,113.05 143.3,111.762 143.803,111.258 143.803,110.158 144.303,109.658 144.303,109.647 144.665,109.285 U2.5@145.55,109.285
TPS_S2: RN4.7@192.7,113.3 U2.5@196.45,109.335 | length 6.8
  Top Layer w0.3: RN4.7@192.7,113.3 194,113.3 194.2,113.1 194.2,111.812 194.703,111.308 194.703,110.208 195.203,109.708 195.203,109.697 195.565,109.335 U2.5@196.45,109.335
TX1: C8.1@164.05,85.95 LPBK.1 R3.2@160.6,85.95 TRX.1 | length 48.4
  Top Layer w0.3: R3.2@160.6,85.95 C8.1@164.05,85.95 ; TRX.1 167.402,118.018 167.402,89.302 C8.1@164.05,85.95 ; LPBK.1 166.42,83.08 164.05,85.45 C8.1@164.05,85.95
TX2: C8.1@214.95,86 LPBK.6 R3.2@211.5,86 TRX.5 | length 97.4
  Top Layer w0.3: v1(170.348,86.088) 170.2,86.236 170.2,119.3 TRX.5 ; LPBK.6 175.5,76.6 207.7,76.6 214.95,83.85 214.95,86 R3.2@211.5,86
  Bottom Layer w0.3: v1(170.348,86.088) 171.336,85.1 175.1,85.1 176,84.2 176,79.9 LPBK.6
TX_PSAVE1: GPIO1.8 RN2.1@158.025,89.05 U1.18@154.65,89.715 U2.15@154.85,108.015 | length 64.2
  Top Layer w0.254: v1(133.4,111.5) 132.494,112.406 132.494,112.994 132.95,113.45 132.95,116.186 132.964,116.2 132.964,116.514 GPIO1.8@135.56,119.11 ; U2.15@154.85,108.015 153.365,108.015 152.42,107.07 152.42,102.949 151.417,101.946 151.417,91.733 v1(152.426,90.724) 153.435,89.715 154.65,89.715 157.36,89.715 RN2.1@158.025,89.05
  Bottom Layer w0.254: v1(133.4,111.5) 151.471,93.429 151.471,91.679 v1(152.426,90.724)
TX_PSAVE2: GPIO2.8 RN2.1@208.925,89.1 U1.18@205.55,89.765 U2.15@205.75,108.065 | length 65
  Top Layer w0.254: v1(184.3,111.55) 183.394,112.456 183.394,113.044 183.85,113.5 183.85,116.236 183.864,116.25 183.864,116.564 186.46,119.16 GPIO2.8 ; U2.15@205.75,108.065 204.265,108.065 203.32,107.12 203.32,102.999 202.317,101.996 202.317,91.783 v1(203.326,90.774) 204.335,89.765 205.55,89.765 206.215,89.1 RN2.1@208.925,89.1
  Bottom Layer w0.254: v1(184.3,111.55) 185.018,110.832 185.018,109.6 185.35,109.268 185.35,109.184 194.434,100.1 194.434,99.807 196.157,98.084 196.45,98.084 196.893,97.641 196.918,97.641 199.461,95.098 199.477,95.098 203.326,91.249 v1(203.326,90.774)
TXCLK1: GPIO1.2 U1.22@154.65,94.795 | length 40.9
  Top Layer w0.3: v1(137.2,114.1) 138,114.9 140.45,114.9 143.18,117.63 GPIO1.2 ; U1.22@154.65,94.795 156.095,94.795 156.7,95.4 v1(156.7,95.9)
  Bottom Layer w0.3: v1(137.2,114.1) 137.6,113.7 137.6,112.007 147.634,101.973 148.227,101.973 152.267,97.933 152.267,97.7 153.177,96.789 153.177,96.402 153.88,95.7 156.5,95.7 v1(156.7,95.9)
TXCLK2: GPIO2.2 U1.22@205.55,94.845 | length 44.5
  Top Layer w0.3: v1(188.1,114.15) 188.9,114.95 191.35,114.95 194.08,117.68 GPIO2.2 ; U1.22@205.55,94.845 208.145,94.845 v1(208.9,95.6)
  Bottom Layer w0.3: v1(188.1,114.15) 188.5,113.75 188.5,109.2 196.673,101.027 196.673,100.734 197.084,100.323 197.377,100.323 197.82,99.88 198.2,99.88 199.997,98.082 206.418,98.082 v1(208.9,95.6)
TXD_S1: RN4.6@141.8,112.45 U2.7@145.55,106.745 | length 8.5
  Top Layer w0.3: RN4.6@141.8,112.45 142.4,112.45 142.694,112.156 142.694,111.656 143.3,111.05 143.3,109.95 143.8,109.45 143.8,106.95 144.005,106.745 U2.7@145.55,106.745
TXD_S2: RN4.6@192.7,112.5 U2.7@196.45,106.795 | length 8.5
  Top Layer w0.3: RN4.6@192.7,112.5 193.3,112.5 193.594,112.206 193.594,111.706 194.2,111.1 194.2,110 194.7,109.5 194.7,107 194.905,106.795 U2.7@196.45,106.795
TXDATA1: GPIO1.1 U1.19@154.65,90.985 U2.13@154.85,105.475 | length 62
  Top Layer w0.3: v1(134.6,113.3) 136.652,115.352 139.802,115.352 142,117.55 142,121.11 GPIO1.1 ; U1.19@154.65,90.985 153.465,90.985 v1(152.5,91.95) 151.897,92.553 151.897,101.747 152.9,102.75 152.9,104.85 153.525,105.475 U2.13@154.85,105.475
  Bottom Layer w0.3: v1(134.6,113.3) 134.5,113.3 134.1,112.9 134.1,111.6 152.5,93.2 v1(152.5,91.95)
TXDATA2: GPIO2.1 U1.19@205.55,91.035 U2.13@205.75,105.525 | length 62.3
  Top Layer w0.3: v1(185.5,113.35) 187.552,115.402 190.702,115.402 192.9,117.6 192.9,121.16 GPIO2.1 ; U1.19@205.55,91.035 204.365,91.035 v1(203.4,92) 202.797,92.603 202.797,101.797 203.8,102.8 203.8,104.9 204.425,105.525 U2.13@205.75,105.525
  Bottom Layer w0.3: v1(185.5,113.35) 185.4,113.35 185,112.95 185,111.65 185.448,111.202 185.448,109.777 186.69,108.535 186.69,108.45 194.863,100.278 194.863,99.985 196.335,98.513 196.628,98.513 197.071,98.07 197.155,98.07 203.225,92 v1(203.4,92)
TXE_S1: RN4.8@141.8,114.125 U2.3@145.55,111.825 | length 5.5
  Top Layer w0.3: RN4.8@141.8,114.125 143.025,114.125 143.803,113.347 143.803,112.047 144.025,111.825 U2.3@145.55,111.825
TXE_S2: RN4.8@192.7,114.175 U2.3@196.45,111.875 | length 5.5
  Top Layer w0.3: RN4.8@192.7,114.175 193.925,114.175 194.703,113.397 194.703,112.097 194.925,111.875 U2.3@196.45,111.875
TXEN1: GPIO1.5 RN2.2@158.9,89.05 U1.17@154.65,88.445 U2.17@154.85,110.555 | length 76.9
  Top Layer w0.254: v1(133.225,112.775) v1@133.371,112.921 ; v1@133.371,112.922 133.371,116.178 134.772,117.579 135.629,117.579 136.9,118.85 136.9,121.09 GPIO1.5 ; U2.17@154.85,110.555 153.005,110.555 150.959,108.509 150.959,90.191 v1(152.3,88.85) 152.705,88.445 154.65,88.445 157.205,88.445 157.6,88.05 158.6,88.05 158.9,88.35 RN2.2@158.9,89.05
  Bottom Layer w0.254: v1(133.225,112.775) 133.225,112.175 132.846,111.796 132.846,111.254 134.056,110.044 134.056,109.319 151,92.375 151,90.15 v1(152.3,88.85)
TXEN2: GPIO2.5 RN2.2@209.8,89.1 U1.17@205.55,88.495 U2.17@205.75,110.605 | length 77.1
  Top Layer w0.254: v1(184.125,112.825) v1@184.271,112.971 ; v1@184.271,112.972 184.271,116.228 185.672,117.629 186.529,117.629 187.8,118.9 187.8,121.14 GPIO2.5 ; U2.17@205.75,110.605 203.905,110.605 201.859,108.559 201.859,90.241 v1(203.2,88.9) 203.605,88.495 205.55,88.495 208.105,88.495 208.5,88.1 209.5,88.1 209.8,88.4 RN2.2@209.8,89.1
  Bottom Layer w0.254: v1(184.125,112.825) 183.746,112.446 183.746,111.304 184.35,110.7 184.35,109.475 184.944,108.881 184.944,108.722 198.411,95.254 198.73,95.254 199.054,94.93 199.054,94.471 199.571,93.954 199.63,93.954 199.954,93.63 199.954,93.571 201.9,91.625 201.9,90.2 v1(203.2,88.9)
VCC: BFR.1 C7.1 C9.2 CP11.1 CP12.1 CP21.2 CP22.2 PWR.2 RN1.1 RN1.2 RN1.3 RN2.6 RN2.7 U1.24 U2.20 | length 227.1
  Top Layer w0.5: PWR.2 125.75,114 CP11.1 CP12.1 ; CP12.1@128.7,114.05 CP12.1 ; v2(129,116.5) CP12.1 ; v2(139.9,89.675) 140.85,89.675 140.9,89.625 140.9,88.75 RN1.3@140.9,87.95 ; BFR.1@152.8,121.55 153.85,120.5 v2(153.85,117.95) 151.85,117.95 154.85,114.95 U2.20@154.85,114.365 ; U1.24@154.65,97.335 156.165,97.335 156.65,96.85 C7.1@158.15,96.85 ; v2(157.375,103.1) 157.375,99.125 v2(158,98.5) 158.15,98.35 C7.1@158.15,96.85 ; RN2.6@159.7,90.45 158.9,90.45 158.9,90.819 157.544,92.175 158.296,92.927 158.363,92.927 158.9,93.464 158.9,96.1 C7.1@158.15,96.85 ; v3(161.75,117.95) 162.95,116.75 v3(166.75,116.75) ; v2(173.1,115.5) 175.25,115.5 CP21.2 CP22.2 180.45,115.45 v2(180.5,115.5) ; v2(190.075,88.8) RN1.2@191.8,88.8 ; RN1.3@191.8,88 RN1.2@191.8,88.8 ; RN1.1@191.8,89.675 RN1.2@191.8,88.8 ; v3(202,119.9) 202,118.2 202.25,117.95 202.325,117.875 202.325,117.05 204.96,114.415 U2.20@205.75,114.415 ; BFR.1@203.55,121.45 BFR.1@203.7,121.6 ; U1.24@205.55,97.385 208.565,97.385 C7.1@209.05,96.9 ; v2(209.4,104.9) v2(209.4,98.5) 209.05,98.15 C7.1@209.05,96.9 ; RN2.6@210.6,90.5 209.8,90.5 v2(209.8,91.525) 209.8,96.15 C7.1@209.05,96.9
  Bottom Layer w0.5: v2(129,116.5) 129,116.675 130.275,117.95 v2(153.85,117.95) ; v2(139.9,89.675) 148.35,89.675 149.852,88.173 153.048,88.173 157.05,92.175 v2(157.375,92.175) ; v2(157.375,103.1) 157.375,113.6 153.85,117.125 v2(153.85,117.95) ; v3(161.75,117.95) v2(153.85,117.95) ; v3(166.75,116.75) 166.8,116.7 171.9,116.7 v2(173.1,115.5) ; v2(180.5,115.5) 184.592,115.5 185.219,116.127 194.027,116.127 197.8,119.9 v3(202,119.9) ; v2(190.075,88.8) 190.652,88.223 204.148,88.223 207.45,91.525 v2(209.8,91.525) ; BFR.1@203.7,121.6 v3(202,119.9) ; v2(209.4,104.9) 207.875,106.425 207.875,114.725 v2(206.9,115.7) 206.2,115.7 v3(202,119.9)
pads on no net: LPBK.3 LPBK.4 RN2.4 RN2.5

## Polygon pours and split planes (outlines as drawn)
GND on Bottom Layer "GND" (solid, remove dead copper, pour order 4): 219,124 219,76 121,76 121,124
GND on Top Layer "Bottom Overlay-No Net" (solid, pour order 7): 219,76 219,124 121,124 121,76

## Keep-outs
Keep-Out Layer:
  lines w0.254: 121,76 219,76 219,124 121,124 121,76

## Silkscreen, mask and mechanical layers (free items; w line width, h text height)
Top Overlay:
  lines w0.254: 122.3,116.2 123.1,116.2 ; 122.7,115.8 122.7,116.6 ; 130.075,118.125 130.875,118.125 ; 130.275,117.825 130.675,117.825 ; 159.5,86 161.3,87.8 162.15,87.8 165.475,87.8 165.875,88.2 165.875,88.9 ; 165.2,123.9 166,123.9 ; 165.4,124.2 165.8,124.2 ; 167.8,123.9 168.6,123.9 ; 168,124.2 168.4,124.2 ; 170.3,123.9 171.1,123.9 ; 170.5,124.2 170.9,124.2 ; 172.9,123.9 173.7,123.9 ; 173.1,124.2 173.5,124.2 ; 180.98,118.225 181.78,118.225 ; 181.18,117.925 181.58,117.925 ; 210.3,85.9 212.1,87.7 212.95,87.7 216.275,87.7 216.675,88.1 216.675,88.8 ; 120,75 220,75 220,125 120,125 120,75
  text "TD" at 142.55,117.125 h1.2
  text "TD" at 193.45,117.125 h1.2
  text "RA" at 132.2,117.1 h1.2
  text "RP" at 134.8,117.1 h1.2
  text "TE" at 137.2,117.1 h1.2
  text "RD" at 139.925,117.1 h1.2
  text "RA" at 183.1,117.1 h1.2
  text "RP" at 185.7,117.1 h1.2
  text "TE" at 188.1,117.1 h1.2
  text "RD" at 190.825,117.1 h1.2
  text "T1" at 164.6,116.9 h1.2
  text "R1" at 167.1,116.9 h1.2
  text "T2" at 169.7,116.9 h1.2
  text "R2" at 172.2,116.9 h1.2
  text "PA" at 129.6,115.625 h1.2
  text "TC" at 142.55,115.625 h1.2
  text "PA" at 180.5,115.625 h1.2
  text "TC" at 193.45,115.625 h1.2
  text "RH" at 132.2,115.6 h1.2
  text "TP" at 134.8,115.6 h1.2
  text "RS" at 137.3,115.6 h1.2
  text "RC" at 139.9,115.6 h1.2
  text "RH" at 183.1,115.6 h1.2
  text "TP" at 185.7,115.6 h1.2
  text "RS" at 188.2,115.6 h1.2
  text "RC" at 190.8,115.6 h1.2
  text "LP12" at 165.6,82.7 h1.2
  text "LP21" at 165.825,76.85 h1.2
Bottom Overlay:
  text "Header Pin Mappings" at 217.125,115.4 h1.5
  text "Jumpers" at 179.75,114.75 h1.4
  text "CA - Jumper, ClkDivA. Default HIGH State" at 179.75,112.75 h1.4
  text "RA - RX Acquire" at 217.1,112.75 h1.4
  text "CB - Jumper, ClkDivB. Default HIGH State" at 179.75,110.75 h1.4
  text "RS - RX S/N" at 217.1,110.75 h1.4
  text "BT - Jumper, BT Set. Default HIGH State" at 179.75,108.75 h1.4
  text "TE - TX Enable" at 217.1,108.75 h1.4
  text "PA - PLL Acquire" at 217.1,106.75 h1.4
  text "BFR- Pull high to disable buffers." at 179.75,106.6 h1.4
  text "RX - RX Hold" at 217.1,104.75 h1.4
  text "Normally low." at 179.8,104.5 h1.4
  text "TD - TX Data" at 217.125,102.75 h1.4
  text "Defaulted Connections" at 179.75,102.15 h1.4
  text "TC - TX Clock" at 217.1,100.75 h1.4
  text "TE - Default HIGH State." at 179.75,100.15 h1.4
  text "RD - RX Data" at 217.1,98.75 h1.4
  text "TP - Default LOW State" at 179.75,98.15 h1.4
  text "RC - RX Clock" at 217.1,96.75 h1.4
  text "RP - Default LOW State." at 179.75,96.15 h1.4
  text "RP - RX Power Save" at 217.1,94.75 h1.4
  text "RH - Default HIGH State" at 179.75,94.15 h1.4
  text "TP - TX Power Save" at 217.1,92.75 h1.4
  text "T1 - Analog TX Out for Modem 1" at 217.1,90.75 h1.4
  text "T2 - Analog TX Out for Modem 2" at 217.1,88.75 h1.4
  text "R1 - Analog RX In for Modem 1" at 217.1,86.75 h1.4
  text "R2 - Analog RX In for Modem 2" at 217.1,84.75 h1.4